# EAGLE board Schéma PAJCO_V2 (EAGLE 9.7.0)
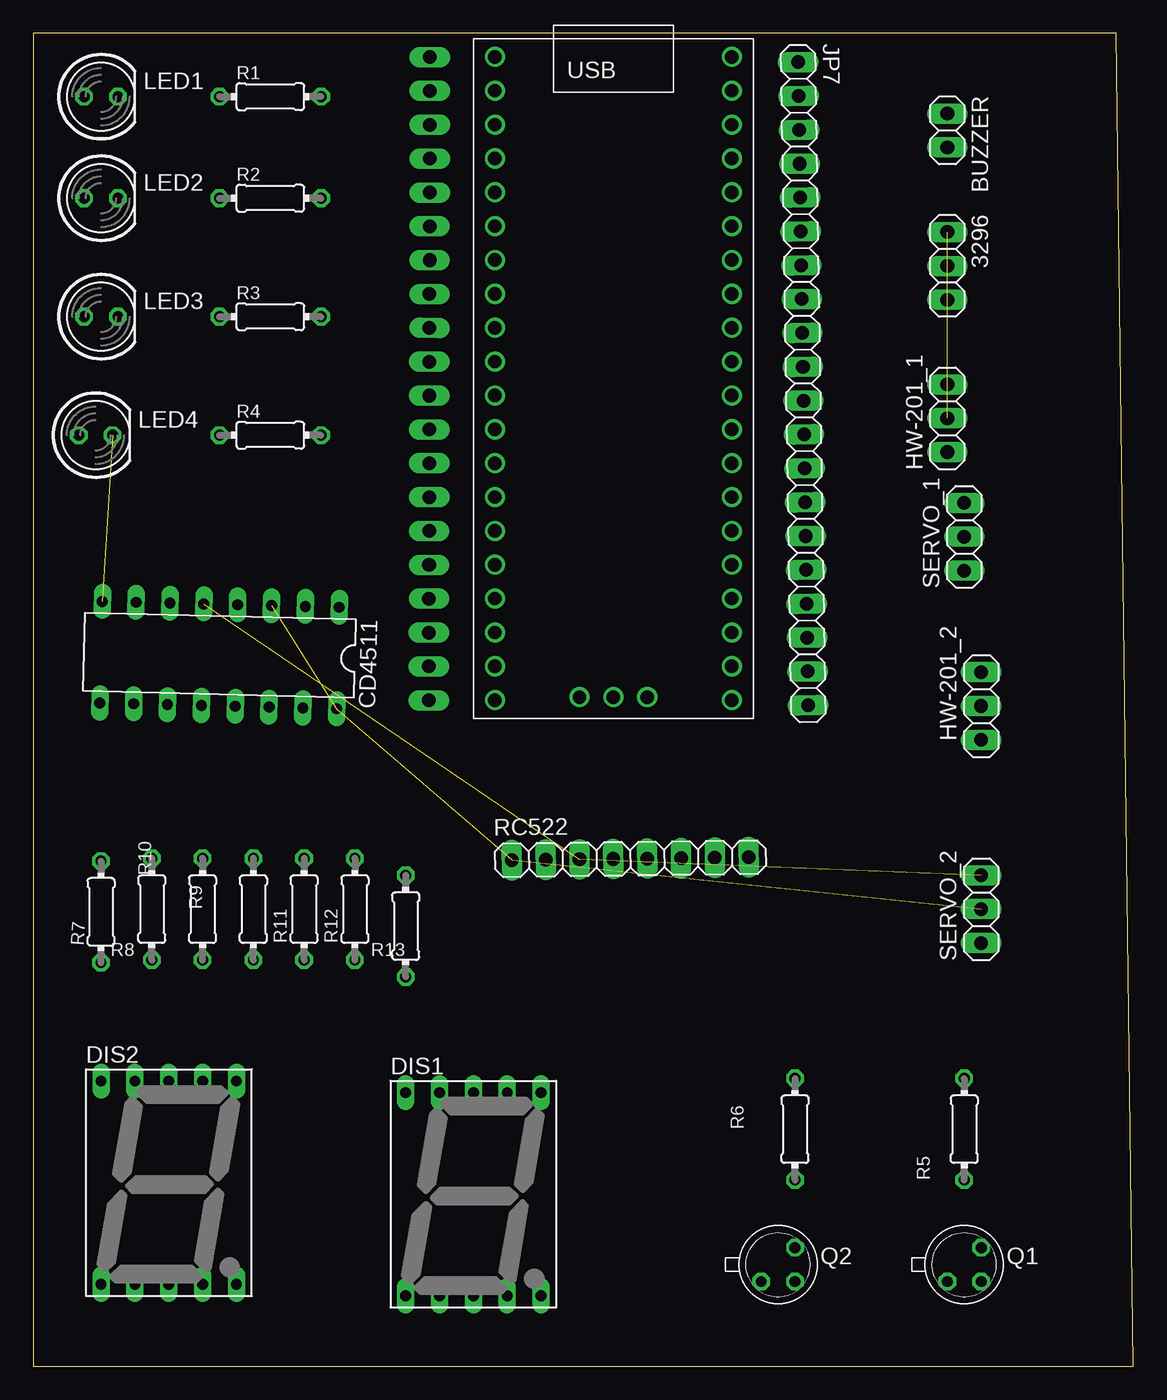
[diagram p0: board, top side]
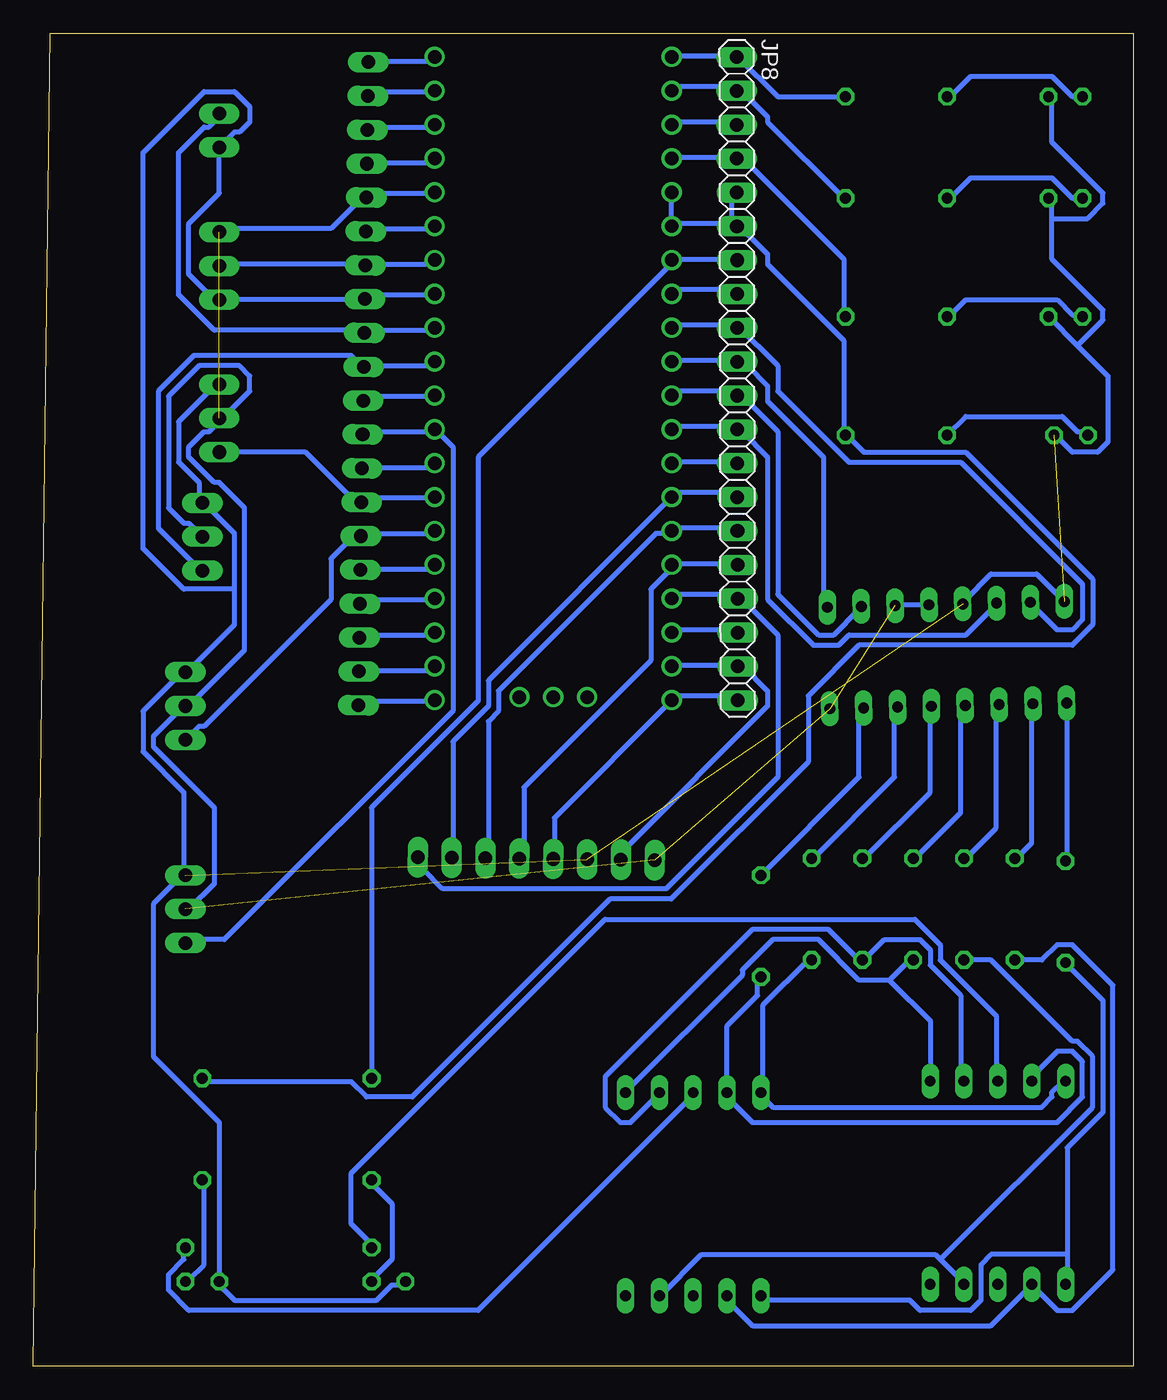
[diagram p1: board, bottom side, seen from below]

Size 82.53 x 100 mm. Coordinates in mm from the lower left corner, seen from the top.
Outline: 0,0 82.53,0 81.26,100 0,100 0,0
Copper layers (1*16): Top / Bottom
Stack-up Default Layer Stack: Top SilkScreen Epoxy Ink / Top SolderMask SR:Green 0.0254mm Dk 4.3 / Top Surface Finish Lead-Free 0.02mm / Top CuFoil:007 0.035mm / Dielectric-1 User Defined 1.5mm / Bottom CuFoil:007 0.035mm / Bottom Surface Finish Lead-Free 0.02mm / Bottom SolderMask SR:Green 0.0254mm Dk 4.3 / Bottom SilkScreen Epoxy Ink
Design rules: minimum copper width 15mil, minimum drill size 0.35mm, copper clearance wire_polygon to wire_polygon 15mil, copper clearance wire_polygon to pad_smd 15mil, copper clearance wire_polygon to via 15mil, copper clearance pad_smd to pad_smd 15mil, copper clearance pad_smd to via 15mil, copper clearance via to via 15mil, copper clearance smd to pad (same net) 6mil, copper clearance smd to via (same net) 6mil, copper clearance smd to smd (same net) 6mil, dimension clearance 40mil, via restrict clearance 0mil, restrict clearance 0mil, drill distance 6mil, keepout clearance 0mil

## Footprints (pad centres in the part's own frame; a part is rotated, then mirrored left to right if it is on the bottom)
1X03 = drill 1.016 long: 1 -2.54,0; 2 0,0; 3 2.54,0
1X02 = drill 1.016 long: 1 -1.27,0; 2 1.27,0
DIL16 = drill 0.813 long: 1 -8.89,-3.81; 2 -6.35,-3.81; 3 -3.81,-3.81; 4 -1.27,-3.81; 5 1.27,-3.81; 6 3.81,-3.81; 7 6.35,-3.81; 8 8.89,-3.81; 9 8.89,3.81; 10 6.35,3.81; 11 3.81,3.81; 12 1.27,3.81; 13 -1.27,3.81; 14 -3.81,3.81; 15 -6.35,3.81; 16 -8.89,3.81
HDSP-M = drill 0.813 long: 1 -5.08,-7.62; 2 -2.54,-7.62; 3 0,-7.62; 4 2.54,-7.62; 5 5.08,-7.62; 6 5.08,7.62; 7 2.54,7.62; 8 0,7.62; 9 -2.54,7.62; 10 -5.08,7.62
1X20 = drill 1.016 long: 1 -24.13,0; 2 -21.59,0; 3 -19.05,0; 4 -16.51,0; 5 -13.97,0; 6 -11.43,0; 7 -8.89,0; 8 -6.35,0; 9 -3.81,0; 10 -1.27,0; 11 1.27,0; 12 3.81,0; 13 6.35,0; 14 8.89,0; 15 11.43,0; 16 13.97,0; 17 16.51,0; 18 19.05,0; 19 21.59,0; 20 24.13,0
LED5MM = drill 0.813 octagon: A -1.27,0; K 1.27,0
TO18 = drill 0.813 octagon: 1 -1.27,-1.27; 2 1.27,-1.27; 3 1.27,1.27
0204/7 = drill 0.813 octagon: 1 -3.81,0; 2 3.81,0
1X08 = drill 1.016 long: 1 -8.89,0; 2 -6.35,0; 3 -3.81,0; 4 -1.27,0; 5 1.27,0; 6 3.81,0; 7 6.35,0; 8 8.89,0
FT_RASPBERRY-PI-PICO_TH = drill 1: 1 -8.55,24.03; 2 -8.55,21.49; 3 -8.55,18.95; 4 -8.55,16.41; 5 -8.55,13.87; 6 -8.55,11.33; 7 -8.55,8.79; 8 -8.55,6.25; 9 -8.55,3.71; 10 -8.55,1.17; 11 -8.55,-1.37; 12 -8.55,-3.91; 13 -8.55,-6.45; 14 -8.55,-8.99; 15 -8.55,-11.53; 16 -8.55,-14.07; 17 -8.55,-16.61; 18 -8.55,-19.15; 19 -8.55,-21.69; 20 -8.55,-24.23; 21 9.23,-24.23; 22 9.23,-21.69; 23 9.23,-19.15; 24 9.23,-16.61; 25 9.23,-14.07; 26 9.23,-11.53; 27 9.23,-8.99; 28 9.23,-6.45; 29 9.23,-3.91; 30 9.23,-1.37; 31 9.23,1.17; 32 9.23,3.71; 33 9.23,6.25; 34 9.23,8.79; 35 9.23,11.33; 36 9.23,13.87; 37 9.23,16.41; 38 9.23,18.95; 39 9.23,21.49; 40 9.23,24.03; GND 0.34,-24; SWCLK -2.2,-24; SWDIO 2.88,-24

## Placement (x,y rotation side)
3296  [1X03]  68.58,82.55 270 top
BUZZER  [1X02]  68.58,92.71 270 top
CD4511  [DIL16]  13.97,53.35 178.6 top
DIS1  HD-H103  [HDSP-M]  33.02,12.9 0 top
DIS2  HD-H103  [HDSP-M]  10.16,13.77 0 top
HW-201_1  [1X03]  68.58,71.12 90 top
HW-201_2  [1X03]  71.12,49.53 90 top
JP7  [1X20]  57.76,73.71 270.9 top
JP8  [1X20]  29.72,74.09 270.1 bottom
LED1  [LED5MM]  5.08,95.25 0 top
LED2  [LED5MM]  5.08,87.63 0 top
LED3  [LED5MM]  5.08,78.74 0 top
LED4  [LED5MM]  4.67,69.85 0 top
Q1  2N2222  [TO18]  69.85,7.62 0 top
Q2  2N2222  [TO18]  55.88,7.62 0 top
R1  [0204/7]  17.78,95.25 0 top
R2  [0204/7]  17.78,87.63 0 top
R3  [0204/7]  17.78,78.74 0 top
R4  [0204/7]  17.78,69.85 0 top
R5  [0204/7]  69.85,17.78 90 top
R6  [0204/7]  57.15,17.78 90 top
R7  [0204/7]  5.08,34.09 90 top
R8  [0204/7]  8.89,34.29 90 top
R9  [0204/7]  12.7,34.29 90 top
R10  [0204/7]  16.51,34.29 90 top
R11  [0204/7]  20.32,34.29 90 top
R12  [0204/7]  24.13,34.29 90 top
R13  [0204/7]  27.94,33.02 90 top
RC522  [1X08]  44.79,38.07 0.7 top
SERVO_1  [1X03]  69.85,62.23 90 top
SERVO_2  [1X03]  71.12,34.29 90 top
U$1  RASPBERRY-PI-PICO_TH  [FT_RASPBERRY-PI-PICO_TH]  43.18,74.2 0 top

## Library data of the parts
3296 BUZZER HW-201_1 HW-201_2 JP7 JP8 RC522 SERVO_1 SERVO_2 = pinhead
CD4511 = ic-package
DIS1 DIS2 = display-hp; OC_FARNELL: unknown; OC_NEWARK: unknown
LED1-LED4 = led
Q1 Q2 = transistor-npn
R1-R13 = rcl; SPICEPREFIX: R
U$1 = pipico

## Nets
GND: 3296.3 BUZZER.2 CD4511.5 CD4511.8 HW-201_1.3 HW-201_2.3 JP7.8 LED1.K LED2.K LED3.K LED4.K Q1.1 Q2.1 RC522.3 SERVO_1.3 SERVO_2.3 U$1.33
N$1: JP8.1 R1.2 U$1.1
N$2: JP8.3 U$1.3
N$3: JP8.2 R2.2 U$1.2
N$4: JP8.4 R3.2 U$1.4
N$5: LED4.A R4.1
N$6: JP8.5 JP8.6 R4.2 R5.2 U$1.5 U$1.6
N$7: JP8.7 R6.2 U$1.7
N$8: JP8.8 U$1.8
N$9: CD4511.7 JP8.9 U$1.9
N$10: CD4511.1 JP8.10 U$1.10
N$11: BUZZER.1 JP7.9 U$1.32
N$12: CD4511.6 JP8.12 U$1.12
N$13: JP8.13 U$1.13
N$14: JP8.14 RC522.7 U$1.14
N$15: JP8.15 RC522.6 U$1.15
N$16: DIS1.9 DIS2.9 R13.1
N$17: JP8.20 RC522.4 U$1.20
N$18: DIS1.10 DIS2.10 R12.1
N$19: DIS1.7 DIS2.7 R11.1
N$21: JP7.1 U$1.40
N$22: JP7.2 U$1.39
N$23: JP7.3 U$1.38
N$24: JP7.4 U$1.37
N$25: JP8.18 U$1.18
N$26: JP7.6 U$1.35
N$27: 3296.2 JP7.7 U$1.34
N$29: JP8.19 RC522.2 U$1.19
N$30: JP7.10 SERVO_1.1 U$1.31
N$31: JP7.11 U$1.30
N$32: JP7.12 SERVO_2.1 U$1.29
N$33: JP7.13 U$1.28
N$34: HW-201_1.1 JP7.14 U$1.27
N$35: HW-201_2.1 JP7.15 U$1.26
N$36: JP7.16 U$1.25
N$37: JP7.17 U$1.24
N$38: JP7.18 U$1.23
N$39: JP7.19 U$1.22
N$40: JP7.20 U$1.21
N$41: LED1.A R1.1
N$42: LED2.A R2.1
N$43: LED3.A R3.1
N$44: Q2.2 R6.1
N$45: CD4511.2 JP8.11 U$1.11
N$46: DIS2.3
N$47: DIS2.8 Q2.3
N$48: CD4511.9 R7.2
N$49: Q1.2 R5.1
N$50: DIS1.8 Q1.3
N$52: DIS1.6 DIS2.6 R10.1
N$53: DIS1.4 DIS2.4 R9.1
N$54: DIS1.2 DIS2.2 R8.1
N$55: DIS1.1 DIS2.1 R7.1
N$56: JP8.17 RC522.8 U$1.17
N$58: CD4511.10 R8.2
N$59: CD4511.11 R9.2
N$60: CD4511.12 R10.2
N$61: CD4511.13 R11.2
N$62: CD4511.14 R12.2
N$63: CD4511.15 R13.2
N$64: JP8.16 RC522.5 U$1.16
VCC: 3296.1 CD4511.3 CD4511.4 CD4511.16 HW-201_1.2 HW-201_2.2 JP7.5 RC522.1 SERVO_1.2 SERVO_2.2 U$1.36

## Tracks (layer width: path | path; a pad name or v marks a point on that pad's centre or on a via)
GND  (3 unrouted)
  Bottom 0.381: CD4511.8 5.33,57.53 7.24,59.44 10.67,59.44 12.57,57.53 CD4511.5 | U$1.33 52.58,80.39 57.53,80.39 JP7.8 57.91,80.01 3296.3 68.96,80.01 70.87,81.92 70.87,85.72 68.58,88.01 BUZZER.2 67.44,92.58 67.06,92.58 66.29,93.34 66.29,94.49 67.44,95.63 69.72,95.63 74.3,91.06 74.3,61.34 71.25,58.29 67.44,58.29 | Q2.1 54.86,6.1 55.63,6.1 56.77,4.95 67.44,4.95 68.58,6.1 Q1.1 68.58,18.29 73.53,23.24 73.53,34.67 71.25,36.96 | HW-201_1.3 68.58,73.91 71.63,70.87 71.63,67.82 70.1,66.29 70.1,64.77 SERVO_1.3 69.72,64.77 67.44,62.48 67.44,58.29 | 71.25,36.96 71.25,43.05 74.3,46.1 74.3,49.15 71.25,52.2 HW-201_2.3 70.87,52.2 67.44,55.63 67.44,58.29 | 71.25,36.96 SERVO_2.3 | LED3.K 4.19,76.58 | 4.19,76.58 1.91,74.3 1.91,69.34 2.67,68.58 4.57,68.58 5.71,69.72 LED4.K | 6.1,86.11 6.1,83.06 2.29,79.25 2.29,78.49 4.19,76.58 | 6.1,86.11 6.1,87.63 LED2.K | 6.1,86.11 3.43,86.11 2.29,87.25 2.29,88.01 6.1,91.82 6.1,95.25 LED1.K
N$1
  Bottom 0.381: R1.2 26.67,95.25 29.72,98.3 JP8.1 30.1,98.3 34.29,98.3 U$1.1
N$2
  Bottom 0.381: U$1.3 34.29,93.34 30.1,93.34 JP8.3
N$3
  Bottom 0.381: R2.2 21.72,87.63 27.43,93.34 27.43,93.73 29.72,96.01 JP8.2 30.1,96.01 34.29,96.01 U$1.2
N$4
  Bottom 0.381: R3.2 21.72,78.87 21.72,83.06 28.96,90.3 29.72,90.3 JP8.4 30.1,90.68 34.29,90.68 U$1.4
N$5
  Bottom 0.381: R4.1 12.57,71.25 5.33,71.25 4.19,70.1 3.43,70.1 LED4.A
N$6
  Bottom 0.381: U$1.5 34.67,88.01 34.67,85.72 U$1.6 34.29,85.72 30.1,85.72 | R5.2 69.72,21.34 58.67,21.34 57.53,20.19 54.1,20.19 39.24,35.05 34.67,35.05 24.38,45.34 24.38,50.29 20.57,54.1 4.57,54.1 3.05,55.63 3.05,59.05 12.57,68.58 20.19,68.58 21.34,69.72 R4.2 21.72,70.1 21.72,76.96 27.43,82.68 27.43,83.44 29.72,85.72 JP8.6 30.1,85.72 | 30.1,85.72 30.1,88.01 JP8.5
N$7
  Bottom 0.381: R6.2 57.15,41.91 49.15,49.91 49.15,68.2 34.67,82.68 U$1.7 34.29,83.06 30.1,83.06 JP8.7
N$8
  Bottom 0.381: U$1.8 34.29,80.77 30.1,80.77 JP8.8
N$9
  Bottom 0.381: CD4511.7 7.62,57.15 5.71,55.24 4.57,55.24 3.81,56.01 3.81,58.67 12.95,67.82 21.34,67.82 26.67,73.15 26.67,75.06 29.72,78.11 JP8.9 30.1,78.11 34.29,78.11 U$1.9
N$10
  Bottom 0.381: CD4511.1 23.24,57.15 23.24,68.2 27.43,72.39 27.43,73.53 28.96,75.06 29.72,75.06 JP8.10 30.1,75.44 34.29,75.44 U$1.10
N$11
  Bottom 0.381: U$1.32 52.58,77.72 57.53,77.72 JP7.9 57.91,77.72 68.96,77.72 71.63,80.39 71.63,91.06 69.72,92.96 69.34,92.96 68.58,93.73 BUZZER.1
N$12
  Bottom 0.381: CD4511.6 10.29,57.15 12.57,54.86 21.34,54.86 22.1,54.1 24,54.1 27.43,57.53 27.43,68.2 29.34,70.1 JP8.12 29.72,70.48 34.29,70.48 U$1.12
N$13
  Bottom 0.381: U$1.13 34.29,67.82 29.72,67.82 JP8.13
N$14
  Bottom 0.381: JP8.14 29.72,65.53 34.29,65.53 U$1.14 34.67,65.15 48.39,51.44 48.39,49.53 51.05,46.86 51.05,38.48 RC522.7
N$15
  Bottom 0.381: JP8.15 29.72,62.87 34.29,62.87 U$1.15 34.67,62.48 35.81,62.48 47.62,50.67 47.62,49.15 48.39,48.39 48.39,38.48 RC522.6
N$16
  Bottom 0.381: DIS2.9 7.62,21.72 5.71,23.62 4.57,23.62 3.81,22.86 3.81,20.19 5.71,18.29 28.57,18.29 30.48,20.19 DIS1.9 30.48,25.53 28.19,27.81 28.19,28.96 R13.1
N$17
  Bottom 0.381: JP8.20 29.72,50.29 34.29,50.29 U$1.20 34.67,49.91 43.43,41.15 43.43,38.1 RC522.4
N$18
  Bottom 0.381: R12.1 24.38,30.48 27.81,27.05 27.81,20.57 DIS1.10 27.81,20.19 27.05,19.43 6.86,19.43 6.1,20.19 6.1,20.57 5.33,21.34 DIS2.10
N$19
  Bottom 0.381: DIS2.7 12.95,21.72 12.95,27.81 15.24,30.1 15.24,31.24 16,32 18.67,32 20.19,30.48 R11.1 20.57,30.48 22.86,32.77 28.57,32.77 39.62,21.72 39.62,19.43 38.48,18.29 37.72,18.29 35.81,20.19 DIS1.7
N$21
  Bottom 0.381: U$1.40 52.58,97.92 57.15,97.92 JP7.1
N$22
  Bottom 0.381: U$1.39 52.58,95.63 57.15,95.63 JP7.2
N$23
  Bottom 0.381: U$1.38 52.58,92.96 57.15,92.96 JP7.3
N$24
  Bottom 0.381: U$1.37 52.58,90.3 57.15,90.3 JP7.4
N$25
  Bottom 0.381: U$1.18 34.29,55.24 29.72,55.24 JP8.18
N$26
  Bottom 0.381: U$1.35 52.58,85.34 57.53,85.34 JP7.6
N$27
  Bottom 0.381: U$1.34 52.58,82.68 57.53,82.68 JP7.7 57.91,82.68 68.58,82.68 3296.2
N$29
  Bottom 0.381: U$1.19 34.29,52.58 29.72,52.58 JP8.19 29.34,52.58 27.43,50.67 27.43,49.53 38.1,38.86 38.1,38.1 RC522.2
N$30
  Bottom 0.381: U$1.31 52.58,75.06 57.53,75.06 JP7.10 57.91,75.06 58.67,75.82 70.48,75.82 73.15,73.15 73.15,62.87 70.1,59.82 SERVO_1.1
N$31
  Bottom 0.381: U$1.30 52.58,72.77 57.53,72.77 JP7.11
N$32
  Bottom 0.381: JP7.12 57.53,70.1 52.58,70.1 U$1.29 52.2,70.1 51.05,68.96 51.05,49.15 68.2,32 70.87,32 SERVO_2.1
N$33
  Bottom 0.381: U$1.28 52.58,67.44 57.53,67.44 JP7.13
N$34
  Bottom 0.381: U$1.27 52.58,65.15 57.53,65.15 JP7.14 57.91,65.15 58.67,65.15 62.1,68.58 HW-201_1.1
N$35
  Bottom 0.381: U$1.26 52.58,62.48 57.91,62.48 JP7.15 58.29,62.48 60.2,60.58 60.2,57.53 69.72,48.01 70.1,48.01 HW-201_2.1
N$36
  Bottom 0.381: U$1.25 52.58,59.82 57.91,59.82 JP7.16
N$37
  Bottom 0.381: U$1.24 52.58,57.53 57.91,57.53 JP7.17
N$38
  Bottom 0.381: U$1.23 52.58,54.86 57.91,54.86 JP7.18
N$39
  Bottom 0.381: U$1.22 52.58,52.2 57.91,52.2 JP7.19
N$40
  Bottom 0.381: U$1.21 52.58,49.91 57.91,49.91 JP7.20
N$41
  Bottom 0.381: LED1.A 4.57,95.25 6.1,96.77 12.19,96.77 13.72,95.25 R1.1
N$42
  Bottom 0.381: LED2.A 4.57,87.63 6.1,89.15 12.19,89.15 13.72,87.63 R2.1
N$43
  Bottom 0.381: LED3.A 3.81,78.87 4.57,78.87 5.71,80.01 12.57,80.01 13.72,78.87 R3.1
N$44
  Bottom 0.381: Q2.2 57.15,6.48 55.63,8 55.63,12.19 57.15,13.72 R6.1
N$45
  Bottom 0.381: CD4511.2 20.57,56.77 22.48,54.86 23.62,54.86 26.67,57.91 26.67,70.1 29.34,72.77 JP8.11 29.72,73.15 34.29,73.15 U$1.11
N$47
  Bottom 0.381: DIS2.8 10.29,21.72 10.29,26.29 14.48,30.48 14.48,31.62 16.38,33.53 39.62,33.53 58.67,14.48 58.67,10.67 57.15,9.14 Q2.3
N$48
  Bottom 0.381: CD4511.9 4.95,49.53 4.95,38.1 R7.2
N$49
  Bottom 0.381: R5.1 69.72,13.72 69.72,7.62 70.87,6.48 Q1.2
N$50
  Bottom 0.381: Q1.3 71.25,8.76 71.25,8 72.39,6.86 72.39,5.71 70.87,4.19 49.15,4.19 33.15,20.19 DIS1.8
N$52
  Bottom 0.381: 18.29,28.96 20.57,28.96 23.62,32 27.05,32 29.34,29.72 29.34,29.34 38.1,20.57 DIS1.6 | 18.29,28.96 16.76,30.48 R10.1 | DIS2.6 15.24,25.91 18.29,28.96
N$53
  Bottom 0.381: 14.48,8 14.86,8.38 32.38,8.38 35.43,5.33 DIS1.4 | 14.48,8 12.95,6.48 DIS2.4 | R9.1 10.67,30.48 4.57,24.38 4.19,24.38 3.05,23.24 3.05,19.43 14.48,8
N$54
  Bottom 0.381: 7.62,6.1 10.67,3.05 28.57,3.05 30.48,4.95 DIS1.2 | R8.1 6.86,30.48 5.71,31.62 4.57,31.62 1.52,28.57 1.52,7.24 4.57,4.19 5.71,4.19 7.62,6.1 | 7.62,6.1 DIS2.2
N$55
  Bottom 0.381: 4.95,8.38 4.95,16.38 2.29,19.05 2.29,27.43 4.95,30.1 R7.1 | 4.95,8.38 4.95,6.48 DIS2.1 | 4.95,8.38 10.67,8.38 11.43,7.62 11.43,4.95 12.19,4.19 16,4.19 16.76,4.95 27.81,4.95 DIS1.1
N$56
  Bottom 0.381: U$1.17 34.29,57.91 29.72,57.91 JP8.17 29.34,57.53 26.67,54.86 26.67,44.2 35.05,35.81 51.82,35.81 53.34,37.34 53.34,38.1 RC522.8
N$58
  Bottom 0.381: CD4511.10 7.62,49.53 7.62,39.24 8.76,38.1 R8.2
N$59
  Bottom 0.381: CD4511.11 10.29,49.53 10.29,40.39 12.57,38.1 R9.2
N$60
  Bottom 0.381: CD4511.12 12.95,49.53 12.95,41.53 16.38,38.1 R10.2
N$61
  Bottom 0.381: CD4511.13 15.24,49.15 15.24,43.05 20.19,38.1 R11.2
N$62
  Bottom 0.381: CD4511.14 17.91,49.15 17.91,44.2 24,38.1 R12.2
N$63
  Bottom 0.381: R13.2 20.57,44.2 20.57,49.15 CD4511.15
N$64
  Bottom 0.381: JP8.16 29.72,60.2 34.29,60.2 U$1.16 34.67,59.82 36.2,58.29 36.2,52.96 45.72,43.43 45.72,38.1 RC522.5
VCC  (4 unrouted)
  Bottom 0.381: SERVO_1.2 70.87,63.25 71.25,63.25 72.39,64.39 72.39,72.77 70.1,75.06 67.06,75.06 66.29,74.3 66.29,73.15 68.58,70.87 | SERVO_2.2 70.87,34.29 68.96,36.2 68.96,41.91 73.53,46.48 73.53,47.24 71.25,49.53 HW-201_2.2 70.87,49.53 66.67,53.72 66.67,64.39 68.58,66.29 68.96,66.29 70.87,68.2 70.87,68.96 69.72,70.1 69.34,70.1 68.58,70.87 | 68.58,70.87 HW-201_1.2 | CD4511.4 15.62,57.15 17.53,57.15 CD4511.3 | U$1.36 52.58,88.01 57.53,88.01 JP7.5 57.91,87.63 60.2,85.34 68.58,85.34 3296.1